# Altium PCB Plata_4.PcbDoc
Units mm, origin at the board's own origin, x right, y up, seen from the top; angles counter-clockwise.
Board outline 27 x 18 mm, 2 copper layers (Top Layer, Bottom Layer), stack 1.569 mm thick; 7 components, 4 nets, 12 pads, 0 vias.
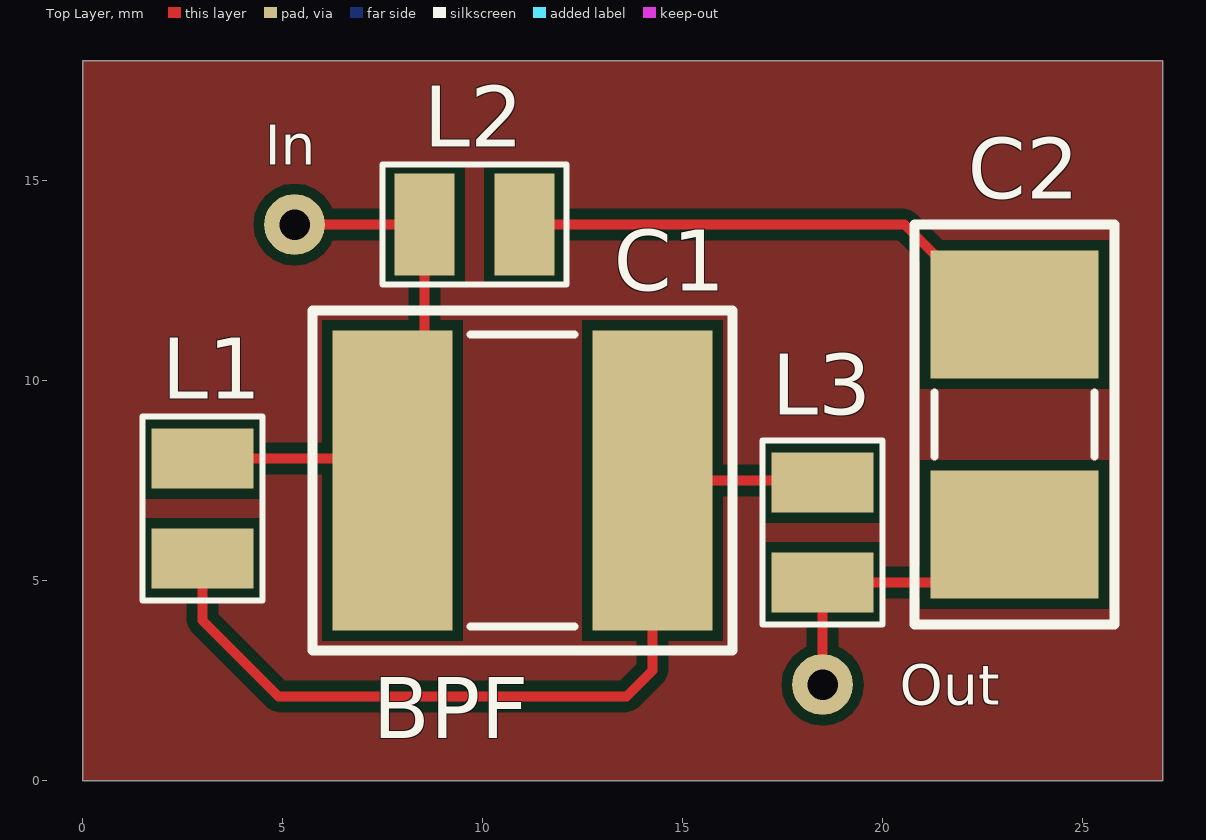
[diagram p0: Top Layer view]
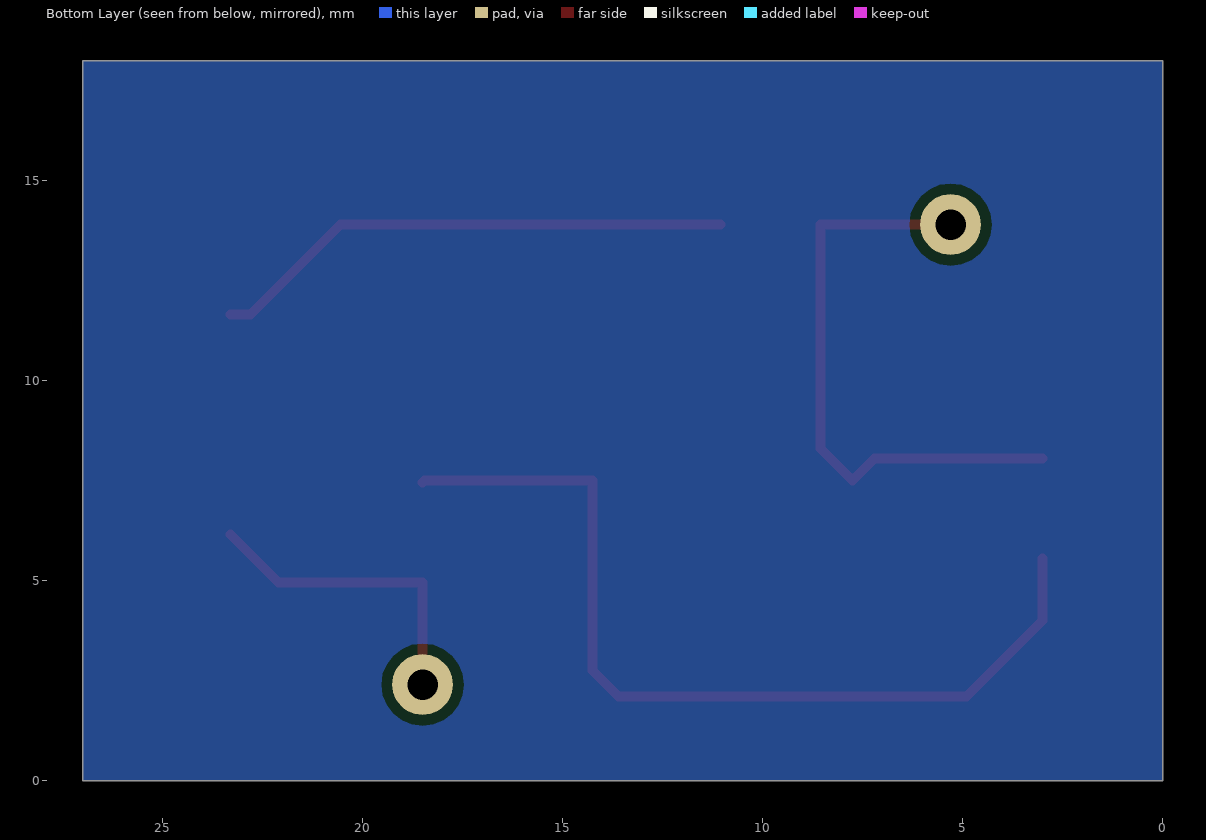
[diagram p1: Bottom Layer view, seen from below]

## Layer stack, top to bottom
Top Solder: solder mask 0.0254, SM-001, Dk 4
Top Layer: signal copper 0.035
Dielectric 1: core 1.4986, Core-043, Dk 4.3
Bottom Layer: signal copper 0.035
Bottom Solder: solder mask 0.0254, SM-001, Dk 4

## Board outline
0,0 27,0 27,18 0,18

## Design rules (kind name [scope] priority, off if disabled: settings)
Clearance [All] p1: gap=0.254 ignorepadtopadclearanceinfootprint=FALSE except(0: Arc-Hole Track-Hole SMDPad-Hole THPad-Hole Via-Hole Fill-Hole Poly-Hole Region-Hole Text-Hole)
PolygonConnect [All] p1: connectstyle=Relief reliefconductorwidth=0.254 reliefentries=4 polygonreliefangle="90 Angle" airgapwidth=0.254
RoutingVias [All] p1: holewidth=0.711 width=1.27 viastyle="Through Hole" minholewidth=0.711 minwidth=1.27 maxholewidth=0.711 maxwidth=1.27
SolderMaskExpansion [All] p1: expansion=0.102 istentingtop=FALSE
Width [All] p1: maxlimit=0.254 minlimit=0.254 preferedwidth=0.254
30 further rules are at their usual default settings.

## Classes and differential pairs
component class Sheet4: In L1 L3 Out

## Components (designator, comment, footprint, x,y, rotation, side; value= is the part's Value field where it differs from the comment)
C1 "C1,C3" C1,C3 11,7.5 r180 top
C2 "C2" C2 23.3,8.9 r270 top
In "PIN" PIN 5.3,13.9 r180 top (schematic designator PIN1)
L1 "L1,L2,L3" L1,L2,L3 3,6.8 r90 top
L2 "L1,L2,L3" L1,L2,L3 9.8,13.9 r0 top
L3 "L1,L2,L3" L1,L2,L3 18.5,6.2 r270 top
Out "PIN" PIN 18.5,2.4 r90 top (schematic designator PIN2)

## Footprints (in the part's own frame and the unit in brackets; to place one, negate y for a bottom-side part, rotate by r counter-clockwise, add the part's x,y. Pads: shape width x height; smd on the part's side, far side on the other; paste and mask are expansions set on the pad)
C1,C3 [mm]
  rect 3x7.5 smd: 1(-3.25,0) 2(3.25,0)
  silkscreen extent -5.25,-4.25 5.25,4.25, body extent -2.92,-3.3 2.91,3.3, height 2.18
C2 [mm]
  rect 3.2x4.2 smd: 1(-2.75,0) 2(2.75,0)
  silkscreen extent -5,-2.5 5,2.5, body extent -2.4,-1.7 2.4,1.7, height 2.7
L1,L2,L3 [mm]
  rect 1.5x2.54 smd: 1(-1.25,0) 2(1.25,0)
  silkscreen extent -2.3,-1.5 2.3,1.5
PIN [mil]
  round 60 hole 30: 1(0,0)

## Nets (pads, with @x,y where several pads share a name; then routed paths per layer and width w, separated by ;. In a path a pad name is that pad's centre, name@x,y a point inside that pad or via, vN(x,y) a via of type N, cw(c..) or ccw(c..) an arc to the next point about the centre after c; other vN are vias at no path point)
NetC1_1: C1.1 L1.1 L3.1 | length 22.9
  Top Layer w0.254: L1.1 3,4 4.9,2.1 13.6,2.1 14.25,2.75 C1.1 18.45,7.5 L3.1
NetC1_2: C1.2 In.1 L1.2 L2.1 | length 15
  Top Layer w0.254: L1.2 7.2,8.05 C1.2 8.55,8.3 L2.1 In.1
NetC2_1: C2.1 L2.2 | length 13.2
  Top Layer w0.254: L2.2 20.55,13.9 22.8,11.65 C2.1
NetC2_2: C2.2 L3.2 Out.1 | length 7.8
  Top Layer w0.254: Out.1 L3.2 22.1,4.95 C2.2

## Polygon pours and split planes (outlines as drawn)
no net on Top Layer "NONET_L01_P001" (solid, pour order 1): 0,18 27,18 27,0 0,0
no net on Bottom Layer "NONET_L02_P000" (solid, pour order 0): 0,18 27,18 27,0 0,0

## Silkscreen, mask and mechanical layers (free items; w line width, h text height)
Top Overlay:
  text "BPF" at 7.254,1.054 h1.52